# EAGLE board programmerv2 (EAGLE 4.16)
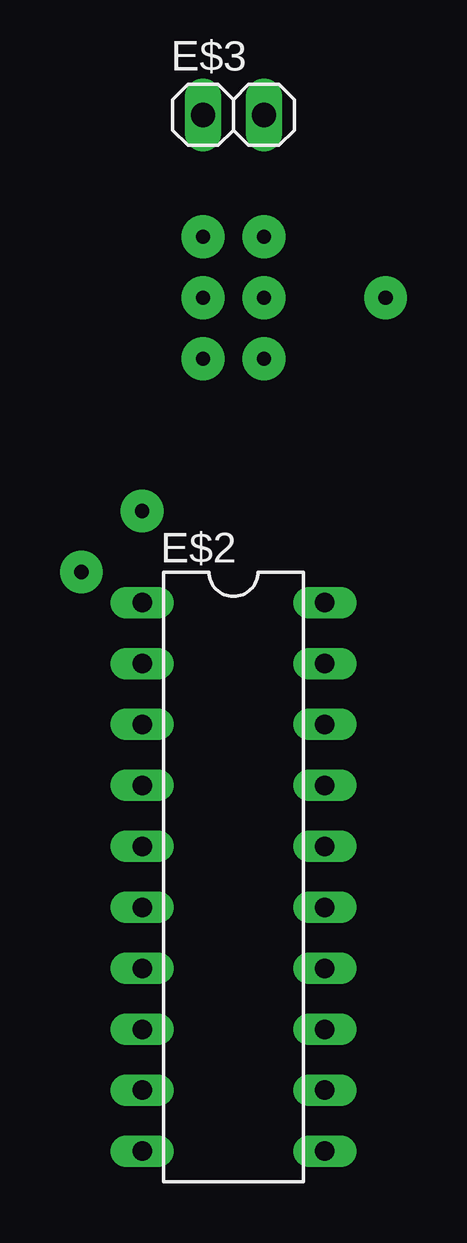
[diagram p0: board, top side]
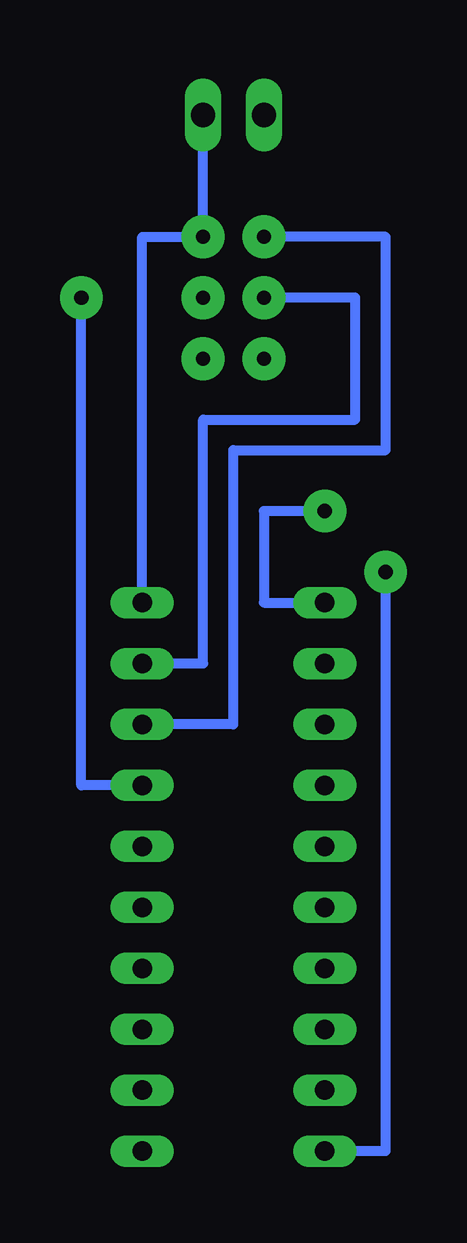
[diagram p1: board, bottom side, seen from below]

No outline drawn. Coordinates in mm, seen from the top.
Copper layers (1*16): Top 0.035mm / dielectric 1.5mm / Bottom 0.035mm
Design rules "default": minimum track width 10mil, minimum drill 24mil, track to track 8mil, track to pad 8mil, pad to pad 8mil, via to via 8mil, smd to smd 8mil, copper to edge 40mil, drill to drill 8mil, minimum pad ring 10mil, minimum via ring 8mil, stop-mask expansion 4mil, vias tented up to drill 0mil, thermal gap 10mil

## Footprints (pad centres in the part's own frame; a part is rotated, then mirrored left to right if it is on the bottom)
DIL20 = drill 0.813 long: 1 -11.43,-3.81; 2 -8.89,-3.81; 3 -6.35,-3.81; 4 -3.81,-3.81; 5 -1.27,-3.81; 6 1.27,-3.81; 7 3.81,-3.81; 8 6.35,-3.81; 9 8.89,-3.81; 10 11.43,-3.81; 11 11.43,3.81; 12 8.89,3.81; 13 6.35,3.81; 14 3.81,3.81; 15 1.27,3.81; 16 -1.27,3.81; 17 -3.81,3.81; 18 -6.35,3.81; 19 -8.89,3.81; 20 -11.43,3.81
1X02 = drill 1.016 long: 1 -1.27,0; 2 1.27,0

## Placement (x,y rotation side)
E$2  [DIL20]  54.61,16.51 270 top
E$3  [1X02]  54.61,48.26 0 top

## Library data of the parts
E$2 = ic-package
E$3 = pinhead

## Nets
S$1: E$2.20 E$3.2
S$2: E$2.17
S$3: E$2.1
S$4: E$2.10
S$5: E$2.19
S$6: E$2.18

## Tracks (layer width: path | path; a pad name or v marks a point on that pad's centre or on a via)
S$1  (via drill 0.6 pad 1.78)
  Bottom 0.406: E$2.20 58.42,43.18 v55.88,43.18 E$3.2
S$2  (via drill 0.6 pad 1.78)
  Bottom 0.406: v60.96,40.64 60.96,20.32 E$2.17
S$3  (via drill 0.6 pad 1.78)
  Bottom 0.406: v50.8,31.75 53.34,31.75 53.34,27.94 E$2.1
S$4  (via drill 0.6 pad 1.78)
  Bottom 0.406: v48.26,29.21 48.26,5.08 E$2.10
S$5  (via drill 0.6 pad 1.78)
  Bottom 0.406: v53.34,40.64 49.53,40.64 49.53,35.56 55.88,35.56 55.88,25.4 E$2.19
S$6  (via drill 0.6 pad 1.78)
  Bottom 0.406: v53.34,43.18 48.26,43.18 48.26,34.29 54.61,34.29 54.61,22.86 E$2.18
S$7  (via drill 0.6 pad 1.78)
  other vias: 53.34,38.1
S$8  (via drill 0.6 pad 1.78)
  other vias: 55.88,38.1
S$9  (via drill 0.6 pad 1.78)
  other vias: 55.88,40.64